# EAGLE board SOIC_8_UNI_BREAKOUT (EAGLE 5.10)
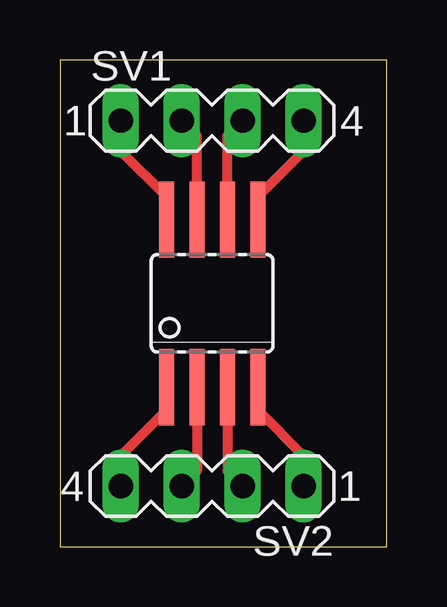
[diagram p0: board, top side]

Size 13.64 x 20.31 mm. Coordinates in mm from the lower left corner, seen from the top.
Outline: 0,0 13.64,0 13.64,20.31 0,20.31 0,0
Copper layers (1*16): Top 0.035mm / dielectric 1.5mm / Bottom 0.035mm
Design rules "default": minimum track width 10mil, minimum drill 24mil, track to track 8mil, track to pad 8mil, pad to pad 8mil, via to via 8mil, smd to smd 8mil, copper to edge 40mil, drill to drill 8mil, minimum pad ring 10mil, minimum via ring 8mil, stop-mask expansion 4mil, vias tented up to drill 0mil, thermal gap 10mil

## Footprints (pad centres in the part's own frame; a part is rotated, then mirrored left to right if it is on the bottom)
MA04-1 = drill 1.016 long: 1 -3.81,0; 2 -1.27,0; 3 1.27,0; 4 3.81,0
SOIC_8_UNI = smd 0.635 x 1.27: 1 -1.905,-4.445; 2 -0.635,-4.445; 3 0.635,-4.445; 4 1.905,-4.445; 5 1.905,4.445; 6 0.635,4.445; 7 -0.635,4.445; 8 -1.905,4.445; P$5 1.905,-2.54; P$6 0.635,-2.54; P$8 -0.635,-3.81; P$10 -1.905,-2.54; P$11 -1.905,-3.81; P$13 0.635,-3.81; P$15 1.905,-3.175; P$17 0.635,-2.54; P$18 -0.635,-2.54; P$19 -1.905,2.54; P$20 -0.635,2.54; P$21 0.635,2.54; P$22 1.905,2.54; P$23 1.905,3.175; P$24 0.635,3.175; P$25 -0.635,3.175; P$26 -1.905,3.175

## Placement (x,y rotation side)
SV1  [MA04-1]  6.35,17.78 0 top
SV2  [MA04-1]  6.35,2.54 180 top
U$1  SOIC_8_UNI  [SOIC_8_UNI]  6.35,10.16 0 top

## Library data of the parts
SV1 SV2 = con-lstb
U$1 = custom

## Nets
N$1: SV1.4 U$1.5
N$2: SV1.3 U$1.6
N$3: SV1.2 U$1.7
N$4: SV1.1 U$1.8
N$5: SV2.3 U$1.2
N$6: SV2.2 U$1.3
N$7: SV2.1 U$1.4
N$8: SV2.4 U$1.1

## Tracks (layer width: path | path; a pad name or v marks a point on that pad's centre or on a via)
N$1
  Top 0.406: U$1.5 10.16,16.51 SV1.4
N$2
  Top 0.406: U$1.6 6.99,17.14 SV1.3
N$3
  Top 0.406: U$1.7 5.71,17.14 SV1.2
N$4
  Top 0.406: U$1.8 2.54,16.51 SV1.1
N$5
  Top 0.406: U$1.2 5.71,3.17 SV2.3
N$6
  Top 0.406: U$1.3 6.99,3.17 SV2.2
N$7
  Top 0.406: U$1.4 10.16,3.81 SV2.1
N$8
  Top 0.406: U$1.1 2.54,3.81 SV2.4